# Altium PCB R14FANEXT_ok.PcbDoc
Units mm, origin at the board's own origin, x right, y up, seen from the top; angles counter-clockwise.
Board outline 11.43 x 14.48 mm, 2 copper layers (Top Layer, Bottom Layer); 9 components, 6 nets, 30 pads, 0 vias.
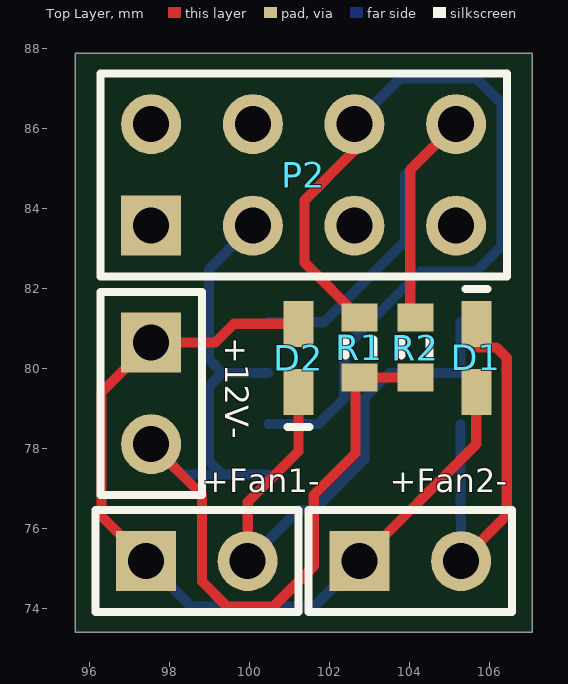
[diagram p0: Top Layer view]
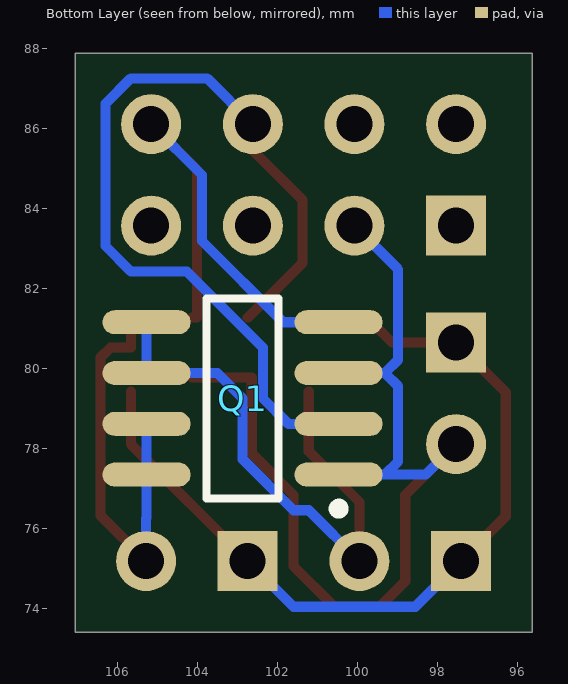
[diagram p1: Bottom Layer view, seen from below]

## Layer stack, top to bottom
Top Layer: signal copper 0.0356
Dielectric: dielectric 0.32, FR-4, Dk 4.8
Bottom Layer: signal copper 0.0356

## Board outline
95.631,73.406 107.061,73.406 107.061,87.884 95.631,87.884

## Design rules (kind name [scope] priority, off if disabled: settings)
Clearance [All] p1: gap=0.254
PolygonConnect [All] p1: connectstyle=Relief reliefconductorwidth=0.254 reliefentries=4 polygonreliefangle="90 Angle"
RoutingVias [All] p1: holewidth=0.711 width=1.27 viastyle="Through Hole" minholewidth=0.711 minwidth=1.27 maxholewidth=0.711 maxwidth=1.27
SilkscreenOverComponentPads [All] p1: minsilkscreentomaskgap=0.254
SolderMaskExpansion [All] p1: expansion=0.102
Width [All] p1: maxlimit=0.254 minlimit=0.254 preferedwidth=0.254
27 further rules are at their usual default settings.

## Components (designator, comment, footprint, x,y, rotation, side; value= is the part's Value field where it differs from the comment)
+12V- "Power" HDR1X2 97.536,80.645 r270 top (schematic designator P1)
+Fan1- "FAN-2" HDR1X2 97.409,75.184 r0 top (schematic designator P4)
+Fan2- "FAN-1" HDR1X2 102.743,75.184 r0 top (schematic designator P3)
D1 "CDBU0520" DIOM1709X09N 105.664,80.264 r270 top
D2 "CDBU0520" DIOM1709X09N 101.219,80.264 r90 top
P2 "AUX-1" HDR2X4 97.536,83.566 r0 top
Q1 "IRF7103" SO-8_N 102.87,79.248 r0 bottom
R1 "Res3" J1-0603 102.743,80.518 r90 top
R2 "Res3" J1-0603 104.14,80.518 r90 top

## Footprints (in the part's own frame and the unit in brackets; to place one, negate y for a bottom-side part, rotate by r counter-clockwise, add the part's x,y. Pads: shape width x height; smd on the part's side, far side on the other; paste and mask are expansions set on the pad)
DIOM1709X09N [mm] "Molded Diode, 2-Leads, Body 1.7x0.9mm, IPC Medium Density"
  rect 1.15x0.75 smd: 1(-0.85,0) 2(0.85,0)
  silkscreen extent -1.73,-0.27 -1.73,0.27, body extent -0.9,-0.5 0.9,0.5, height 0.85
HDR1X2 [mm] "Connector; Header; 2 Position"
  rect 1.5x1.5 hole 0.9: 1(0,0)
  round 1.5 hole 0.9: 2(2.54,0)
  silkscreen extent -1.27,-1.27 3.81,1.27
HDR2X4 [mm] "Connector; Header; 4x2 Position"
  rect 1.5x1.5 hole 0.9: 1(0,0)
  round 1.5 hole 0.9: 2(0,2.54) 3(2.54,0) 4(2.54,2.54) 5(5.08,0) 6(5.08,2.54) 7(7.62,0) 8(7.62,2.54)
  silkscreen extent -1.27,-1.27 8.89,3.81
J1-0603 [mm] "Chip Resistor, Body 1.6x0.8mm, IPC High Density"
  rect 0.7x0.9 smd: 1(-0.75,0) 2(0.75,0)
  silkscreen extent -0.2,-0.35 0.2,0.35, body extent -0.85,-0.48 0.85,0.48, height 0.9
SO-8_N [mm] "SOIC, 8-Leads, Body 4.9x3.9mm, Pitch 1.27mm, IPC Medium Density"
  oval 2.2x0.6 smd: 1(-2.4,1.905) 2(-2.4,0.635) 3(-2.4,-0.635) 4(-2.4,-1.905) 5(2.4,-1.905) 6(2.4,-0.635) 7(2.4,0.635) 8(2.4,1.905)
  silkscreen extent -2.52,-2.5 0.9,2.88, body extent -1.95,-2.45 1.95,2.45, height 1.75

## Part data
+12V- +Fan1- +Fan2-: library part "Header 2", "Header, 2-Pin"
D1 D2: library part "D Schottky", "Schottky Diode"
P2: library part "Header 4X2", "Header, 4-Pin, Dual row"
Q1: "HEXFET Power MOSFET"
R1 R2: "Resistor"

## Nets (pads, with @x,y where several pads share a name; then routed paths per layer and width w, separated by ;. In a path a pad name is that pad's centre, name@x,y a point inside that pad or via, vN(x,y) a via of type N, cw(c..) or ccw(c..) an arc to the next point about the centre after c; other vN are vias at no path point)
GND: +12V-.2 P2.3 Q1.1 Q1.3 R1.1 R2.1 | length 25.6
  Top Layer w0.254: +12V-.2 98.806,76.835 98.806,74.676 99.441,74.041 100.584,74.041 101.6,75.057 101.6,76.835 102.641,77.876 102.641,79.768 R1.1 R2.1
  Bottom Layer w0.254: +12V-.2 98.298,77.343 99.314,77.343 ; P2.3 98.984,82.474 98.984,80.213 99.314,79.883 ; Q1.1 99.314,77.343 ; Q1.3 99.314,79.883 ; 99.314,77.343 98.984,77.673 98.984,79.553 99.314,79.883
NetD1_1: +Fan2-.2 D1.1 Q1.7 Q1.8 | length 10.5
  Top Layer w0.254: +Fan2-.2 106.426,76.327 106.426,80.264 106.172,80.518 105.664,80.518 D1.1
  Bottom Layer w0.254: Q1.7 Q1.8 105.27,76.264 105.283,76.251 +Fan2-.2
NetD2_1: +Fan1-.2 D2.1 Q1.5 Q1.6 | length 14.2
  Top Layer w0.254: +Fan1-.2 99.949,76.657 101.219,77.927 D2.1
  Bottom Layer w0.254: +Fan1-.2 101.219,76.454 101.6,76.454 102.87,77.724 102.87,79.248 103.505,79.883 Q1.6 Q1.5
NetP2_6: P2.6 Q1.2 R1.2 | length 22.3
  Top Layer w0.254: P2.6 102.616,85.446 101.371,84.201 101.371,82.64 R1.2
  Bottom Layer w0.254: Q1.2 101.727,78.613 102.362,79.248 102.362,80.518 104.267,82.423 105.664,82.423 106.299,83.058 106.299,86.614 105.664,87.249 103.759,87.249 P2.6
NetP2_8: P2.8 Q1.4 R2.2 | length 13.1
  Top Layer w0.254: R2.2 104.013,81.268 104.013,84.963 P2.8
  Bottom Layer w0.254: Q1.4 101.854,81.153 103.886,83.185 103.886,84.836 P2.8
VCC: +12V-.1 +Fan1-.1 +Fan2-.1 D1.2 D2.2 | length 22
  Top Layer w0.254: +Fan1-.1 96.291,76.302 96.291,79.4 +12V-.1 99.136,80.645 99.605,81.114 D2.2 ; +Fan2-.1 105.664,78.105 D1.2
  Bottom Layer w0.254: +Fan1-.1 98.552,74.041 101.6,74.041 +Fan2-.1
pads on no net: P2.1 P2.2 P2.4 P2.5 P2.7

## Silkscreen, mask and mechanical layers (free items; w line width, h text height)
Mechanical 1:
  the board outline again, w0.254